# Altium PCB sion.PcbDoc
Units mm, origin at the board's own origin, x right, y up, seen from the top; angles counter-clockwise.
Board outline 144.6 x 80.67 mm, 2 copper layers (Top Layer, Bottom Layer); 228 components, 204 nets, 884 pads, 2 vias.
Unrouted connection lines stored in the file: 536.
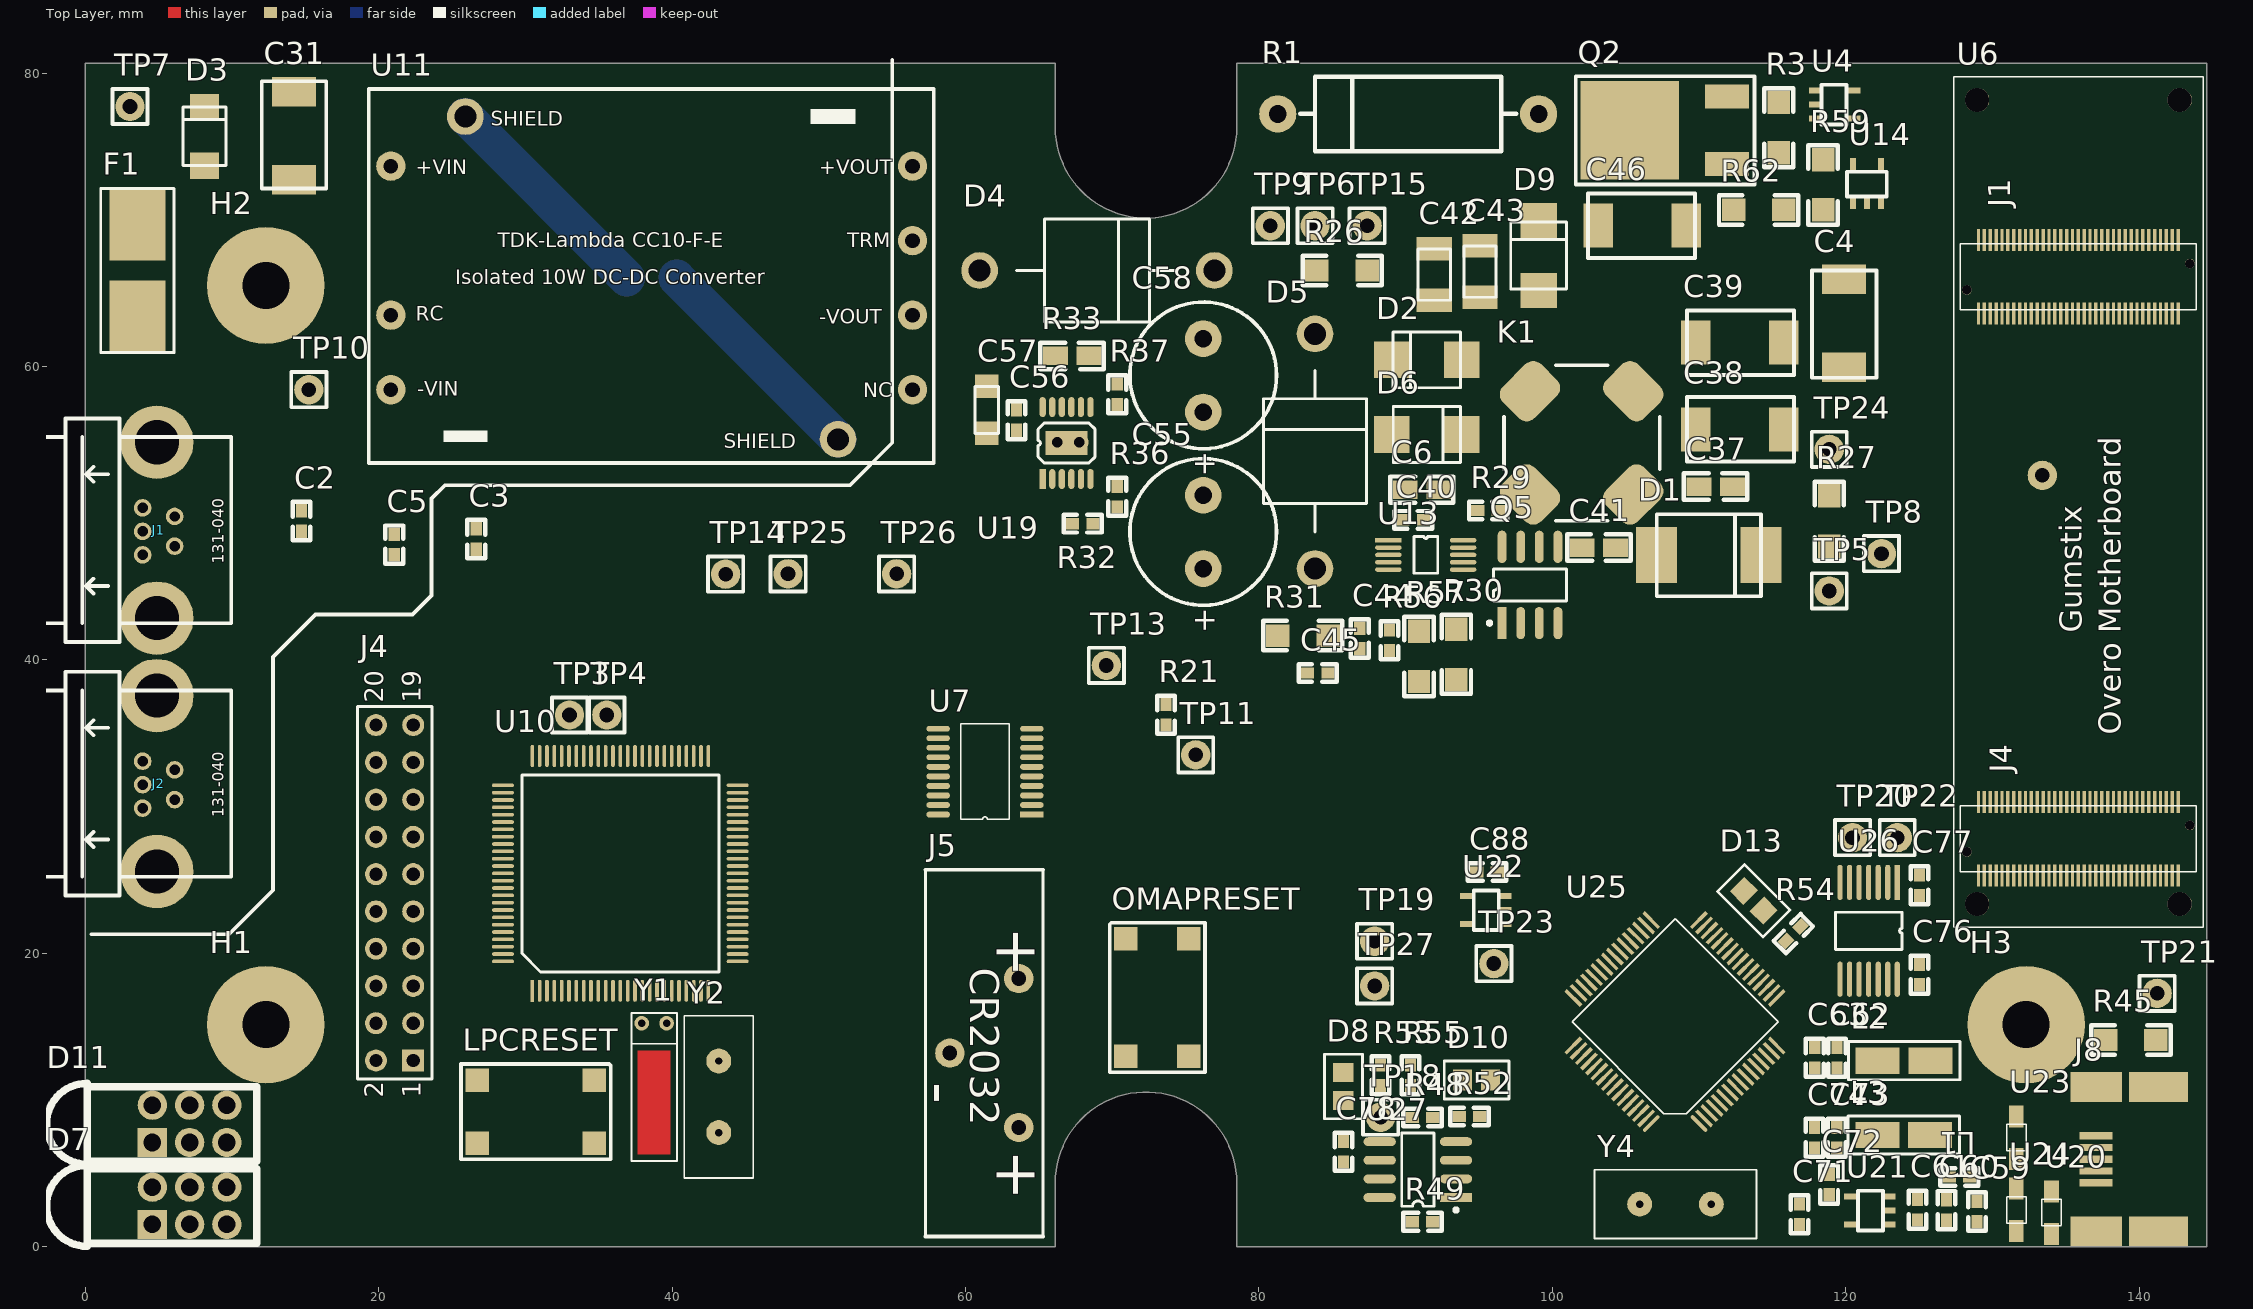
[diagram p0: Top Layer view]
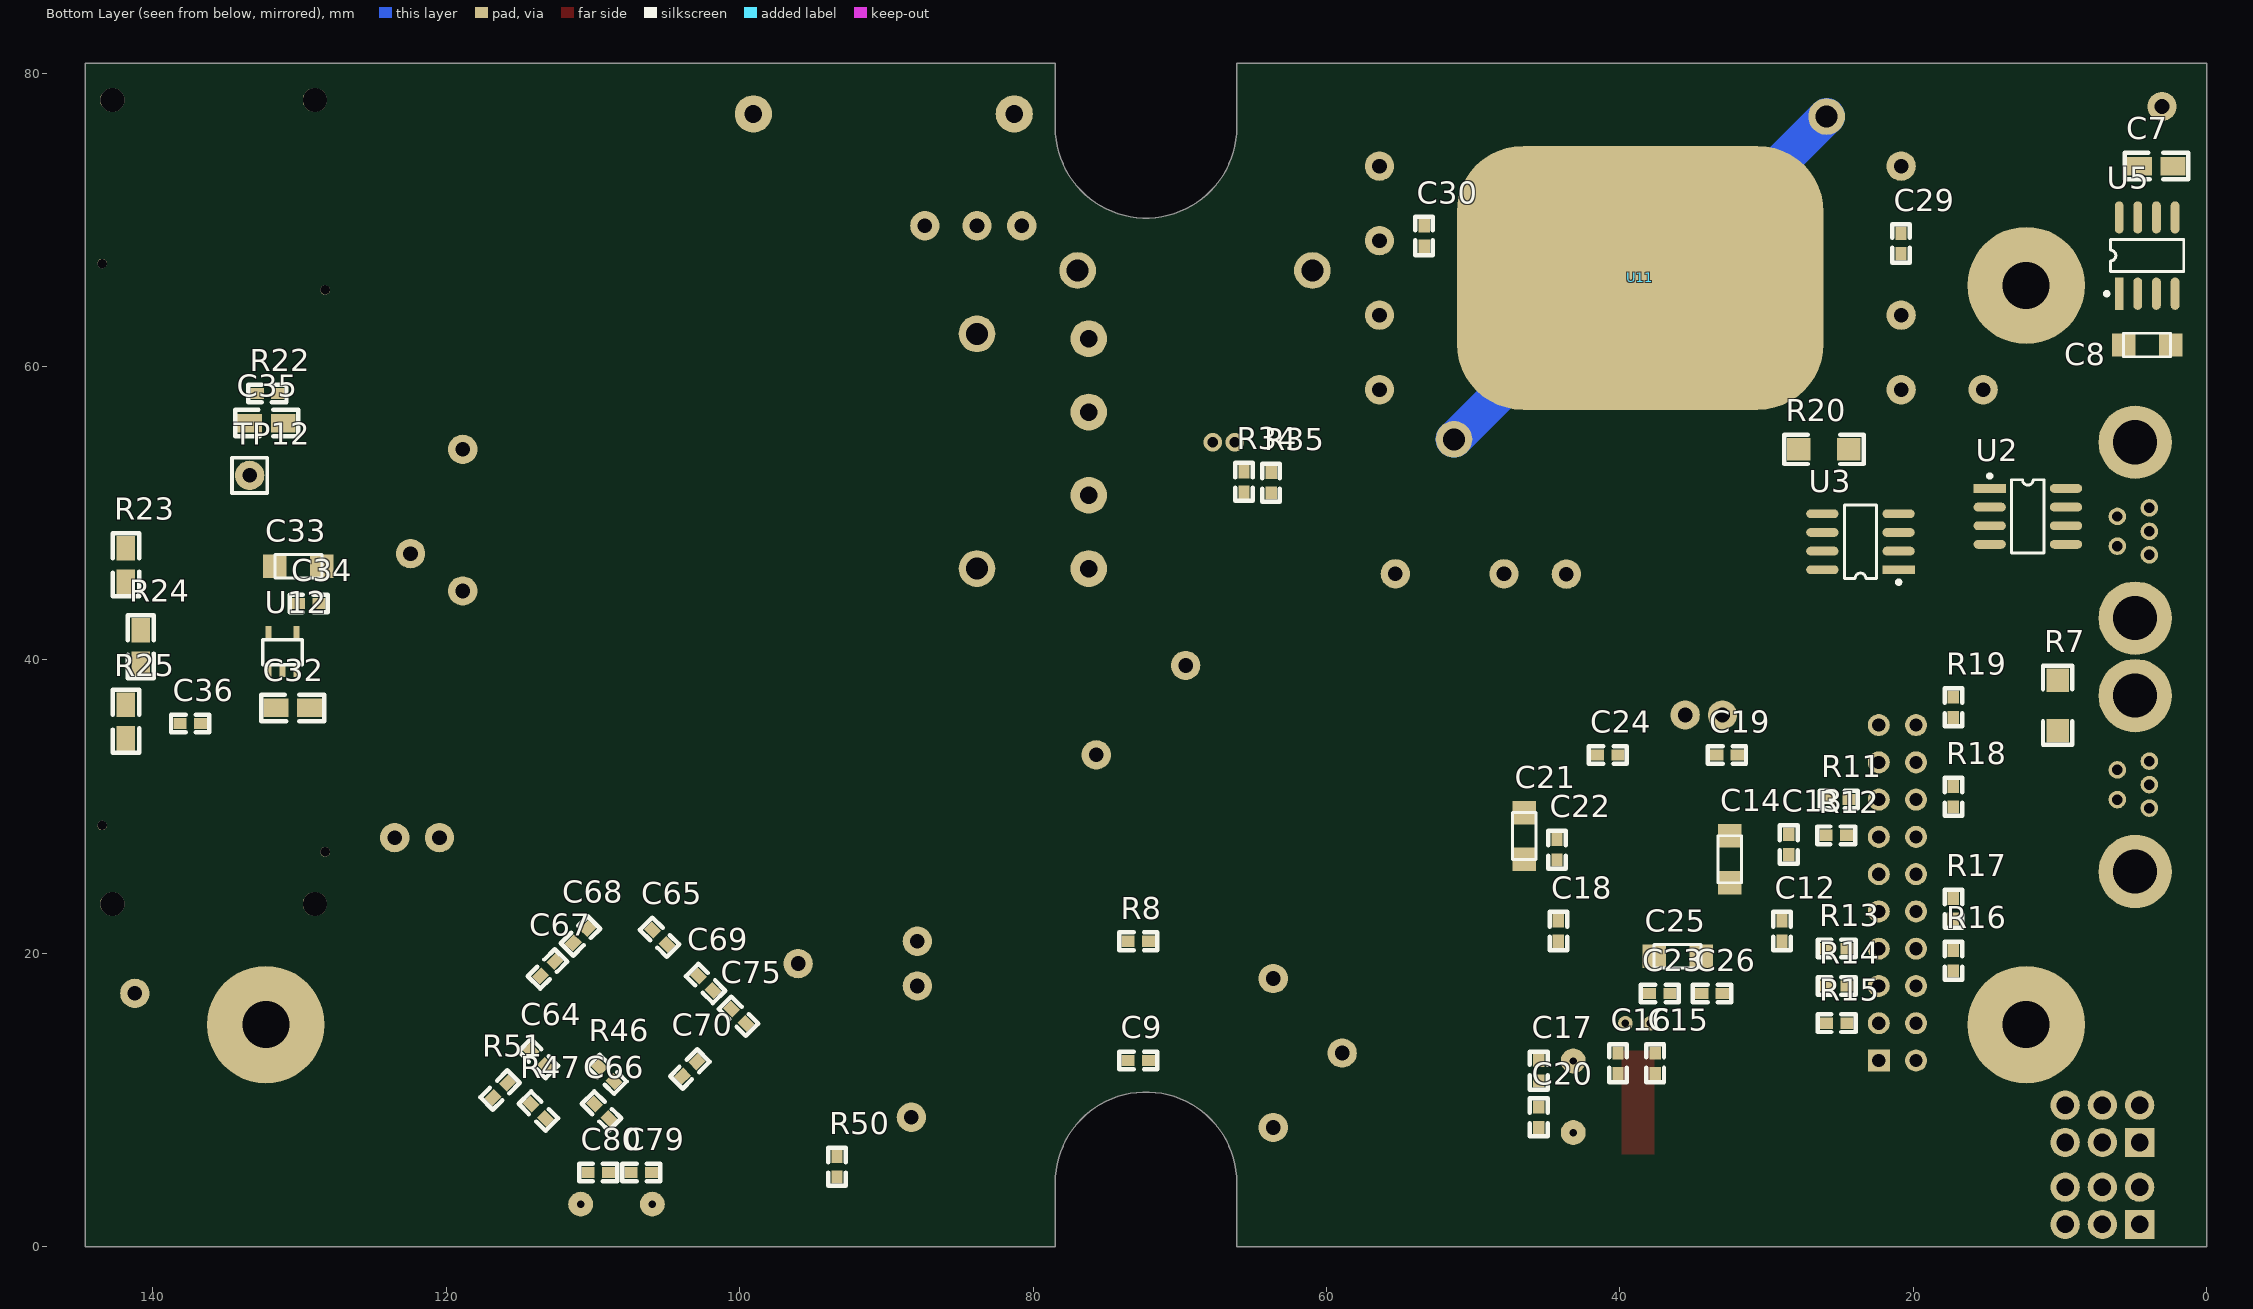
[diagram p1: Bottom Layer view, seen from below]

## Layer stack, top to bottom
Top Layer: signal copper 0.0356
Dielectric: dielectric 0.32, FR-4, Dk 4.8
Bottom Layer: signal copper 0.0356

## Board outline
0,0 0,80.67 66.11,80.67 66.11,76.31 ccw(c72.3,76.31) 78.49,76.31 78.49,80.67 144.6,80.67 144.6,0 78.49,0 78.49,4.36 ccw(c72.3,4.36) 66.11,4.36 66.11,0

## Design rules (kind name [scope] priority, off if disabled: settings)
Clearance [All] p1: gap=0.2
PolygonConnect [All] p1: connectstyle=Relief reliefconductorwidth=0.254 reliefentries=4 polygonreliefangle="90 Angle"
RoutingVias [All] p1: holewidth=0.711 width=1.27 viastyle="Through Hole" minholewidth=0.711 minwidth=1.27 maxholewidth=0.711 maxwidth=1.27
SilkscreenOverComponentPads [All] p1: minsilkscreentomaskgap=0.254
SolderMaskExpansion [All] p1: expansion=0.102
TestPointUsage [All] p1: valid=0 allowmultiple=FALSE
Testpoint [All] p1: side=15 testpointundercomponent=TRUE minsize=1.016 maxsize=2.54 preferedsize=1.524 minholesize=0 maxholesize=1.016 preferedholesize=0.813 testpointgrid=0.025 style=1023 order=0123456789
Width [All] p1: maxlimit=0.254 minlimit=0.254 preferedwidth=0.254
23 further rules are at their usual default settings.

## Classes and differential pairs
component class toplevel_os: D11 H1 H2 H3 H4 ID1 P1 Q6 Q7 R60 R61 R64 R69 R70 R71 R72 TP16 TP17 TP29 TP30
component class U_can_transciever_dualvolt_isolated: C2 C3 C5 C7 C8 D3 F1 J1 J2 R7 TP3 TP4 U2 U3 U5
component class U_can: C1 C47 C86 C87 D7 LPCRESET Q1 Q3 Q4 R2 R4 R5 R6 R28 R38 R39 R40 R41 R42 R43 R44 R68 TP1 TP2 TP28 U1 U7
component class U_Gumstix_Overo: C9 C10 C11 J3 OMAPRESET R8 R9 R10 U6 U7 U8 U9
component class U_LPC1768: C12 C13 C14 C15 C16 C17 C18 C19 C20 C21 C22 C23 C24 C25 C26 J4 R11 R12 R13 R14 R15 R16 R17 R18 R19 U10 Y1 Y2
component class U_powertrain: C29 C30 C31 C32 C33 C34 C35 C36 D4 D5 J5 R20 R21 R22 R23 R24 R25 TP7 TP8 TP9 TP10 TP11 TP12 TP13 TP14 U11 U12
component class U_sepic: C4 C6 C37 C38 C39 C40 C41 C42 C43 C44 C45 C46 D1 D2 D6 D9 K1 Q2 Q5 R1 R3 R26 R27 R29 R30 R31 R56 R57 R59 R62 TP5 TP6 TP15 TP24 TP25 TP26 U4 U13 U14
component class U_supercap: C55 C56 C57 C58 R32 R33 R34 R35 R36 R37 U19
component class U_usb_isolated_uart_x2: C59 C60 C61 C62 C63 C64 C65 C66 C67 C68 C69 C70 C71 C72 C73 C74 C75 C76 C77 C78 C79 C80 C88 D8 D10 D13 J8 L1 L2 L3 R45 R46 R47 R48 R49 R50 R51 R52 R53 R54 R55 TP18 TP19 TP20 TP21 TP22 TP23 TP27 U20 U21 U22 U23 U24 U25 U26 U27 Y4

## Components (designator, comment, footprint, x,y, rotation, side; value= is the part's Value field where it differs from the comment)
C1 "100nF" 0603 114.848,111.144 r0 top
C2 "100nF" 0603 14.732,48.768 r90 top
C3 "47nF" 0603 26.648,47.548 r90 top
C4 "150uF" MCCT-CASED 119.888,59.944 r90 top
C5 "47nF" 0603 21.06,48.564 r270 top
C6 "1uF" 0805 92.256,51.604 r180 top
C7 "1uF" 0805 4.572,73.66 r180 bottom
C8 "10uF" MCCT-CASEA 4.064,61.468 r180 bottom
C9 "100nF" 0603 72.136,12.7 r0 bottom
C12 "100nF" 0603 28.956,20.828 r90 bottom
C13 "100nF" 0603 28.488,26.72 r90 bottom
C14 "10uF" MCCT-CASEA 32.512,26.416 r90 bottom
C15 "18pF" 0603 37.592,13.208 r270 bottom
C16 "18pF" 0603 40.132,13.208 r270 bottom
C17 "18pF" 0603 45.53,12.7 r270 bottom
C18 "100nF" 0603 44.196,20.828 r90 bottom
C19 "100nF" 0603 32.004,33.528 r0 bottom
C20 "18pF" 0603 45.53,8.128 r90 bottom
C21 "10uF" MCCT-CASEA 46.52,28 r270 bottom
C22 "100nF" 0603 44.276,26.356 r90 bottom
C23 "100nF" 0603 36.576,17.272 r0 bottom
C24 "100nF" 0603 40.132,33.528 r0 bottom
C25 "10uF" MCCT-CASEA 36.068,19.812 r180 bottom
C26 "100nF" 0603 33.02,17.272 r0 bottom
C29 "100nF" 0603 20.828,69.088 r270 bottom
C30 "100nF" 0603 53.34,69.596 r270 bottom
C31 "100uF" MCCT-CASED 14.224,78.74 r270 top
C32 "1uF" 0805 131.6,36.732 r180 bottom
C33 "10uF" MCCT-CASEA 130.076,46.384 r180 bottom
C34 "10nF" 0603 130.076,43.844 r180 bottom
C35 "1uF" 0805 133.392,56.139 r180 bottom
C36 "100nF" 0603 136.756,35.676 r0 bottom
C37 "1uF" 0805 112.268,51.816 r180 top
C38 "150uF" MCCT-CASED 115.772,55.724 r180 top
C39 "150uF" MCCT-CASED 115.772,61.624 r180 top
C40 "100nF" 0603 89.824,49.552 r0 top
C41 "10uF" 0805 102.028,47.652 r0 top
C42 "22uF" MCCT-CASEB 91.948,64.516 r90 top
C43 "22uF" MCCT-CASEB 95.068,64.724 r90 top
C44 "33p" 0603 86.868,42.164 r270 top
C45 "1n2" 0603 83.312,39.116 r0 top
C46 "470uF" MCCT-CASED 103.124,69.596 r0 top
C47 "100nF" 0603 123.348,109.744 r90 top
C55 "3F3" ELECTROLYTIC-5-32 76.2,46.228 r90 top
C56 "100nF" 0603 63.48,57.048 r270 top
C57 "10uF" MCCT-CASEA 61.448,57.048 r270 top
C58 "3F3" ELECTROLYTIC-5-32 76.2,56.896 r90 top
C59 "10nF" 0603 128.952,1.704 r90 top
C60 "100nF" 0603 126.852,3.204 r270 top
C61 "4.7uF" 0603 124.888,3.228 r270 top
C62 "4.7uF" 0603 119.404,12.18 r90 top
C63 "100nF" 0603 117.88,12.18 r90 top
C64 "100nF" 0603 113.225,12.344 r45 bottom
C65 "100nF" 0603 104.963,20.606 r45 bottom
C66 "100nF" 0603 108.915,8.752 r45 bottom
C67 "100nF" 0603 113.584,18.451 r135 bottom
C68 "100nF" 0603 110.351,21.684 r315 bottom
C69 "100nF" 0603 102.808,18.451 r225 bottom
C70 "100nF" 0603 103.886,11.626 r135 bottom
C71 "100nF" 0603 116.836,1.512 r90 top
C72 "10nF" 0603 118.868,3.544 r90 top
C73 "4.7uF" 0603 119.38,8.128 r270 top
C74 "100nF" 0603 117.856,8.128 r270 top
C75 "4.7uF" 0603 99.575,15.218 r45 bottom
C76 "100nF" 0603 125.032,19.252 r270 top
C77 "100nF" 0603 125.032,25.348 r270 top
C78 "100nF" 0603 85.752,5.772 r90 top
C79 "18pF" 0603 106.014,5.059 r0 bottom
C80 "18pF" 0603 110.324,5.059 r180 bottom
C86 "100nF" 0603 53.348,109.744 r90 top
C87 "100nF" 0603 47.448,109.744 r90 top
C88 "100nF" 0603 96.24,25.548 r180 top
D1 "SSC53L" SMC 110.664,47.144 r0 top
D2 "MBRS130" SMB 91.44,60.452 r180 top
D3 "SMAJ12A-TR" SMA 8.128,75.692 r90 top
D4 "D SCHOTTKY" DIODE-D1.5mm 60.96,66.548 r0 top
D5 "D SCHOTTKY" DIODE-D1.5mm 83.82,46.228 r90 top
D6 "MBRS130" SMB 91.44,55.372 r0 top
D7 "1882-2781" LED_TRILEVEL 4.572,1.524 r90 top
D8 "LED" 0805LED 85.752,11.876 r270 top
D9 "MBRS130" SMB 99.06,67.564 r90 top
D10 "LED" 0805LED 93.88,11.368 r0 top
D11 "1882-2781" LED_TRILEVEL 4.572,7.112 r90 top
D13 "LED" 0805LED 114.399,22.915 r135 top
F1 "125mA/3A" LITTELFUSE-154 3.556,66.548 r90 top
H1 "HOLE" #6 12.305,15.145 r0 top locked
H2 "HOLE" #6 12.305,65.525 r0 top locked
H3 "HOLE" #6 132.295,15.145 r0 top locked
H4 "HOLE" #6 166.981,222.556 r0 top
ID1 "IDBOX" IDBOX 137.5,210.7 r90 top
J1 "CON5-S" TRIAD5F 6.096,49.784 r90 top
J2 "CON5-S" TRIAD5F 6.096,32.512 r90 top
J4 "ARM JTAG" HDR2X10 22.352,12.7 r90 top
J5 "CR2032" CR2032_VERTICAL 58.928,13.208 r270 top
J8 "USB_MINIB" USB_MINIB 137.068,5.964 r180 top
K1 "10uH" CTX2 98.472,58.32 r315 top
L1 "FERRITE" 0603 128.444,4.752 r180 top
L2 "2.2uH" 1210 123.976,12.688 r180 top
L3 "2.2uH" 1210 123.952,7.62 r180 top
LPCRESET "B3FS" B3FS-1052 25.908,12.192 r0 top
OMAPRESET "B3FS" B3FS-1052 70.104,12.192 r90 top
P1 "SUN_LOGO" SUNSWIFTLOGO 94.488,202.692 r0 top
Q1 "ZXM61N02F" SOT23-3 79.348,109.144 r0 top
Q2 "S6006DS2CT-ND" DPAK_N-MOSFET 105.268,76.096 r90 top
Q3 "ZXM61N02F" SOT23-3 182.348,109.144 r0 top
Q4 "ZXM61N02F" SOT23-3 145.348,109.144 r0 top
Q5 "Si7882DP" SO8 98.472,45.112 r0 top
Q6 "ZXM61N02F" SOT23-3 231.6,227.9 r0 top
Q7 "ZXM61N02F" SOT23-3 204.2,227.9 r0 top
R1 "10R" DIODE0.7 99.06,77.216 r180 top
R2 "10K" 0603 149.948,111.144 r0 top
R3 "100K" 1206 115.428,74.572 r90 top
R4 "10K" 0603 119.048,111.144 r0 top
R5 "10K" 0603 75.148,111.144 r0 top
R6 "100R" 0603 70.848,111.144 r0 top
R7 "0R" 1206 10.16,38.608 r270 bottom
R8 "10K" 0603 72.136,20.828 r0 bottom
R11 "10k" 0603 24.384,30.48 r0 bottom
R12 "10k" 0603 25.952,28.048 r180 bottom
R13 "10k" 0603 25.908,20.32 r180 bottom
R14 "10k" 0603 25.908,17.78 r180 bottom
R15 "10k" 0603 25.908,15.24 r180 bottom
R16 "10k" 0603 17.272,18.796 r90 bottom
R17 "10k" 0603 17.272,22.352 r90 bottom
R18 "10k" 0603 17.272,29.972 r90 bottom
R19 "10k" 0603 17.272,36.068 r90 bottom
R20 "0R" 1206 24.384,54.356 r0 bottom
R21 "4k7" 0603 73.66,35.56 r90 top
R22 "3k3" 0603 132.884,58.171 r180 bottom
R23 "22k" 0805 141.836,45.328 r90 bottom
R24 "22k" 0805 140.82,39.74 r90 bottom
R25 "10k" 0805 141.836,34.66 r90 bottom
R26 "0R01" 1206 87.376,66.548 r180 top
R27 "0R01" 1206 118.872,47.752 r90 top
R28 "10K" 0603 64.948,109.744 r90 top
R29 "80R" 0603 94.916,50.192 r0 top
R30 "17K4" 1206 93.452,42.088 r270 top
R31 "26K" 1206 81.28,41.656 r0 top
R32 "309K" 0603 67.292,49.288 r0 top
R33 "173K" 0805 68.408,60.728 r180 top
R34 "1K" 0603 65.62,51.436 r90 bottom
R35 "1K" 0603 63.768,51.376 r90 bottom
R36 "100K" 0603 70.34,51.828 r270 top
R37 "100K" 0603 70.34,57.416 r90 top
R38 "220R" 0603 186.948,109.744 r90 top
R39 "100R" 0603 176.548,109.744 r90 top
R40 "220R" 0603 170.748,109.744 r90 top
R41 "10K" 0603 165.448,109.744 r90 top
R42 "220R" 0603 159.548,109.744 r90 top
R43 "100R" 0603 135.048,109.744 r90 top
R44 "10K" 0603 129.248,109.744 r90 top
R45 "0R" 1206 141.132,14.092 r180 top
R46 "12k" 0603 108.555,11.267 r45 bottom
R47 "4k7" 0603 113.225,8.752 r45 bottom
R48 "10k" 0603 91.848,8.82 r180 top
R49 "10k" 0603 91.848,1.708 r180 top
R50 "10k" 0603 93.372,4.764 r90 bottom
R51 "10k" 0603 116.817,10.189 r135 bottom
R52 "2k2" 0603 93.652,8.884 r0 top
R53 "1k" 0603 88.292,12.384 r270 top
R54 "1k" 0603 116.913,21.837 r225 top
R55 "1k" 0603 90.324,12.384 r270 top
R56 "65K" 0603 88.9,40.64 r90 top
R57 "10K" 1206 90.912,38.532 r90 top
R59 "11K3" 1206 118.452,70.676 r90 top
R60 "220R" 0603 243.3,228.5 r90 top
R61 "100R" 0603 226.3,228.5 r90 top
R62 "10K" 1206 112.356,70.676 r0 top
R64 "220R" 0603 220.5,228.5 r90 top
R68 "1k" 0603 59.148,109.744 r90 top
R69 "10K" 0603 214.7,228.5 r90 top
R70 "100R" 0603 208.8,228.5 r90 top
R71 "100R" 0603 199,228.5 r90 top
R72 "10K" 0603 193.1,228.5 r90 top
TP1 "RESET" TESTPOINT 154.848,110.544 r0 top
TP2 "RSTOUT" TESTPOINT 97.948,110.544 r0 top
TP3 "RX" TESTPOINT 33.008,36.248 r270 top
TP4 "TX" TESTPOINT 35.548,36.248 r270 top
TP5 "VOUT" TESTPOINT 118.872,44.704 r270 top
TP6 "VIN" TESTPOINT 83.82,69.596 r0 top
TP7 "CAN12V" TESTPOINT 3.048,77.724 r0 top
TP8 "3V3" TESTPOINT 122.428,47.244 r0 top
TP9 "5V" TESTPOINT 80.772,69.596 r0 top
TP10 "CANGND" TESTPOINT 15.24,58.42 r90 top
TP11 "VSENSE" TESTPOINT 75.692,33.528 r90 top
TP12 "ISENSE" TESTPOINT 133.392,52.583 r90 bottom
TP13 "VCAP" TESTPOINT 69.596,39.624 r90 top
TP14 "GND" TESTPOINT 43.648,45.852 r90 top
TP15 "5V" TESTPOINT 87.376,69.596 r90 top
TP16 "SYS_EN" TESTPOINT 257,229.3 r90 top
TP17 "WKUP" TESTPOINT 236.8,229.3 r90 top
TP18 "3V3USB" TESTPOINT 88.292,8.828 r0 top
TP19 "TXD3V3" TESTPOINT 87.884,20.828 r90 top
TP20 "RXD1V8" TESTPOINT 120.46,27.888 r180 top
TP21 "SHD" TESTPOINT 141.224,17.272 r90 top
TP22 "TXD1V8" TESTPOINT 123.508,27.888 r90 top
TP23 "FTDI_RST" TESTPOINT 96.012,19.304 r180 top
TP24 "3V3" TESTPOINT 118.872,54.356 r0 top
TP25 "GND" TESTPOINT 47.9,45.872 r90 top
TP26 "GND" TESTPOINT 55.3,45.872 r90 top
TP27 "RXD3V3" TESTPOINT 87.884,17.78 r90 top
TP28 "CLKOUT" TESTPOINT 90.548,110.544 r90 top
TP29 "SPI1_NIRQ_LPC" TESTPOINT 264.1,229.3 r90 top
TP30 "SPI_NIRQ_OMAP" TESTPOINT 271.5,229.3 r90 top
U1 "MCP120T-300I/TT" SOT23-3 140.848,109.144 r0 top
U2 "SN65HVD232" SO8 12.192,49.784 r270 bottom
U3 "IL712-3E" SO8 23.6,48.056 r90 bottom
U4 "MAX9100" SOT23-5 117.944,78.804 r270 top
U5 "MIC5200" SO8 4.064,67.564 r180 bottom
U6 "Overo" Overo-bare 142.748,23.368 r90 top
U7 "TXB0108PWR" TSSOP20 64.516,29.464 r180 top
U10 "LPC1768" QFP100 30.468,17.452 r90 top
U11 "TDK-LAMBDA CC-E" CC10-F-E 20.828,58.42 r0 top
U12 "MIC5247" SOT23-5 132.108,39.272 r180 bottom
U13 "ADP1621" MSOP10 88.82,48.16 r0 top
U14 "MAX6037CAUKADJ" SOT23-5 120.484,71.184 r0 top
U19 "LTC4425" MS-12 65.26,52.336 r90 top
U20 "PESD5V0X" SOD323 134.02,0.884 r0 top
U21 "REG113-33" SOT23-5 122.932,1.512 r90 top
U22 "SN74AHC1G126" SOT23-5 96.748,21.992 r90 top
U23 "PESD5V0X" SOD323 131.628,5.996 r0 top
U24 "PESD5V0X" SOD323 131.628,3.964 r180 top
U25 "FT2232H" QFP64 109.992,8.393 r135 top
U26 "TXB104PWR" TSSOP14-L 123.508,24.84 r270 top
U27 "93LC46BT-I/SN" SO8 90.832,5.264 r90 top
Y1 "32.768 KHz" WATCHA 39.624,15.24 r180 top
Y2 "12 MHz" HC49/4H 43.18,15.748 r270 top
Y4 "12 MHz" HC49/4H 113.917,2.904 r180 top

## Footprints (in the part's own frame and the unit in brackets; to place one, negate y for a bottom-side part, rotate by r counter-clockwise, add the part's x,y. Pads: shape width x height; smd on the part's side, far side on the other; paste and mask are expansions set on the pad)
0603 [mil]
  rect 35.43x30 smd: 1(0,0) 2(55,0)
  silkscreen extent -24,-24 79,24
0805 [mm]
  rect 1.7x1.27 smd: 1(0,0) 2(2.286,0)
  silkscreen extent -1,-0.9 3.3,0.9
0805LED [mm]
  rect 1.3x1.4 smd: A(0,0) K(1.9,0)
  silkscreen extent -1.25,-1.3 3.15,1.3
1206 [mil]
  rect 62.99x60 smd: 1(0,0) 2(135,0)
  silkscreen extent -39,-39 173,39
1210 [mm]
  rect 3x1.8 smd: 1(-1.8,0) 2(1.8,0)
  silkscreen extent -3.8,-1.3 3.8,1.3
#6 [mm]
  round 8 hole 3.2: 1(0,0)
B3FS-1052 [mm] "SMD SPNO tactile switch"
  rect 1.6x1.6 smd: 1(0.8,-0.825) 2(8.8,-0.825) 3(0.8,-5.125) 4(8.8,-5.125)
  silkscreen extent -0.3,-6.22 9.9,0.28
CC10-F-E [mm]
  round 2 hole 1: 1(0,15.24) 2(0,5.08) 3(0,0) 4(35.56,0) 5(35.56,5.08) 6(35.56,10.16) 7(35.56,15.24)
  round 2.5 hole 1.5: 8(5.08,18.62) 8(30.48,-3.38)
  rrect50% 25x18 smd far side: 8(17.78,7.62)
  Bottom Layer lines w2.5: 5.08,18.62 16.08,7.62 ; 19.48,7.62 30.48,-3.38
  silkscreen extent -1.5,-5 37,20.5
CR2032_VERTICAL [mm] "VBH2032-1-LF Coin cell vertical holder"
  round 2 hole 1: 1(-5.075,4.7) 1(5.075,4.7) 2(0,0)
  silkscreen extent -12.5,-1.65 12.5,6.35
CTX2 [mm] "Coupled Inductors"
  rrect50% 3.05x3.68 smd: 1(0,0) 3(9.96,0)
  rrect50% 3.68x3.05 smd: 2(4.98,-4.98) 4(4.98,4.98)
  silkscreen extent 0,-5 10,5
DIODE0.7 [mm]
  round 2.54 hole 1.2: 1(0,0) 2(17.78,0)
  silkscreen extent 1.52,-2.54 16.26,2.54
DIODE-D1.5mm [mm]
  round 2.5 hole 1.5: A(0,0) K(16,0)
  silkscreen extent 2.5,-3.5 13.5,3.5
DPAK_N-MOSFET [mm] "STD12NF06L"
  rect 1.65x3 smd: 1(-2.3,-6.65) 3(2.3,-6.65)
  rect 6.7x6.7 smd: 2(0,0)
  silkscreen extent -3.68,-8.51 3.68,3.68
ELECTROLYTIC-5-32 [mm] "Supercapacitor"
  round 2.5 hole 1.2: 1(0,0) 2(5,0)
  silkscreen extent -2.5,-5 7.5,5
HC49/4H [mm]
  round 1.7 hole 0.5: 1(3.085,0) 2(7.965,0)
  silkscreen extent 0,-2.35 11.05,2.35
HDR2X10 [mm] "Connector; Header; 10x2 Position"
  rect 1.5x1.5 hole 0.9: 1(0,0)
  round 1.5 hole 0.9: 2(0,2.54) 3(2.54,0) 4(2.54,2.54) 5(5.08,0) 6(5.08,2.54) 7(7.62,0) 8(7.62,2.54) 9(10.16,0) 10(10.16,2.54) 11(12.7,0) 12(12.7,2.54) 13(15.24,0) 14(15.24,2.54) 15(17.78,0) 16(17.78,2.54) 17(20.32,0) 18(20.32,2.54) 19(22.86,0) 20(22.86,2.54)
  silkscreen extent -1.27,-1.27 24.13,3.81
IDBOX [mm] "Infobox"
  silkscreen extent 0,-7 19.95,0
LED_TRILEVEL [mm]
  rect 2x2 hole 1.2: 1(0,0)
  round 2 hole 1.2: 2(0,-2.54) 3(0,-5.08) 4(2.54,-5.08) 5(2.54,-2.54) 6(2.54,0)
  silkscreen extent -1.49,-7.11 4.03,7.21
LITTELFUSE-154 [mm]
  rect 5x3.81 smd: 1(-3.185,0) 2(3.185,0)
  silkscreen extent -5.6,-2.51 5.6,2.5
MCCT-CASEA [mm]
  rect 1.6x1.6 smd: 1(-1.6,0) 2(1.6,0)
  silkscreen extent -1.6,-0.8 1.6,0.8
MCCT-CASEB [mm]
  rect 1.6x2.4 smd: 1(0,0) 2(3.5,0)
  silkscreen extent 0,-1.1 3.5,1.1
MCCT-CASED [mm]
  rect 2x3 smd: 1(0,0) 2(6,0)
  silkscreen extent -0.7,-2.2 6.6,2.2
MS-12 [mm] "LTC4425"
  rect 1.364x0.42 smd: 1(0,0)
  oval 1.364x0.42 smd: 2(0,-0.65) 3(0,-1.3) 4(0,-1.95) 5(0,-2.6) 6(0,-3.25) 7(4.9,-3.25) 8(4.9,-2.6) 9(4.9,-1.95) 10(4.9,-1.3) 11(4.9,-0.65) 12(4.9,0)
  rect 1.651x2.845 smd: 13(2.45,-1.625)
  silkscreen extent 1.1,-3.58 3.8,0.33
MSOP10 [mm] "ADM1191"
  rect 1.8x0.3 smd: 1(0,0)
  oval 1.8x0.3 smd: 2(0,-0.5) 3(0,-1) 4(0,-1.5) 5(0,-2) 6(5.1,-2) 7(5.1,-1.5) 8(5.1,-1) 9(5.1,-0.5) 10(5.1,0)
  silkscreen extent 1.73,-2.25 3.37,0.25
Overo-bare [mm] "Gumstix Overo Motherboard placement"
  round 1.65 hole 1.65 unplated: 0(0,13.8) 0(0,0) 0(54.8,0) 0(54.8,13.8)
  round 0.65 hole 0.65: 0(3.55,14.5) 0(5.35,-0.7) 0(41.85,14.5) 0(43.65,-0.7)
  rect 1.5x0.23 smd: J1_1(40.25,0.1) J1_2(40.25,0.5) J1_3(40.25,0.9) J1_4(40.25,1.3) J1_5(40.25,1.7) J1_6(40.25,2.1) J1_7(40.25,2.5) J1_8(40.25,2.9) J1_9(40.25,3.3) J1_10(40.25,3.7) J1_11(40.25,4.1) J1_12(40.25,4.5) J1_13(40.25,4.9) J1_14(40.25,5.3) J1_15(40.25,5.7) J1_16(40.25,6.1) J1_17(40.25,6.5) J1_18(40.25,6.9) J1_19(40.25,7.3) J1_20(40.25,7.7) J1_21(40.25,8.1) J1_22(40.25,8.5) J1_23(40.25,8.9) J1_24(40.25,9.3) J1_25(40.25,9.7) J1_26(40.25,10.1) J1_27(40.25,10.5) J1_28(40.25,10.9) J1_29(40.25,11.3) J1_30(40.25,11.7) J1_31(40.25,12.1) J1_32(40.25,12.5) J1_33(40.25,12.9) J1_34(40.25,13.3) J1_35(40.25,13.7) J1_36(45.25,13.7) J1_37(45.25,13.3) J1_38(45.25,12.9) J1_39(45.25,12.5) J1_40(45.25,12.1) J1_41(45.25,11.7) J1_42(45.25,11.3) J1_43(45.25,10.9) J1_44(45.25,10.5) J1_45(45.25,10.1) J1_46(45.25,9.7) J1_47(45.25,9.3) J1_48(45.25,8.9) J1_49(45.25,8.5) J1_50(45.25,8.1) J1_51(45.25,7.7) J1_52(45.25,7.3) J1_53(45.25,6.9) J1_54(45.25,6.5) J1_55(45.25,6.1) J1_56(45.25,5.7) J1_57(45.25,5.3) J1_58(45.25,4.9) J1_59(45.25,4.5) J1_60(45.25,4.1) J1_61(45.25,3.7) J1_62(45.25,3.3) J1_63(45.25,2.9) J1_64(45.25,2.5) J1_65(45.25,2.1) J1_66(45.25,1.7) J1_67(45.25,1.3) J1_68(45.25,0.9) J1_69(45.25,0.5) J1_70(45.25,0.1) J4_1(6.95,13.7) J4_2(6.95,13.3) J4_3(6.95,12.9) J4_4(6.95,12.5) J4_5(6.95,12.1) J4_6(6.95,11.7) J4_7(6.95,11.3) J4_8(6.95,10.9) J4_9(6.95,10.5) J4_10(6.95,10.1) J4_11(6.95,9.7) J4_12(6.95,9.3) J4_13(6.95,8.9) J4_14(6.95,8.5) J4_15(6.95,8.1) J4_16(6.95,7.7) J4_17(6.95,7.3) J4_18(6.95,6.9) J4_19(6.95,6.5) J4_20(6.95,6.1) J4_21(6.95,5.7) J4_22(6.95,5.3) J4_23(6.95,4.9) J4_24(6.95,4.5) J4_25(6.95,4.1) J4_26(6.95,3.7) J4_27(6.95,3.3) J4_28(6.95,2.9) J4_29(6.95,2.5) J4_30(6.95,2.1) J4_31(6.95,1.7) J4_32(6.95,1.3) J4_33(6.95,0.9) J4_34(6.95,0.5) J4_35(6.95,0.1) J4_36(1.95,0.1) J4_37(1.95,0.5) J4_38(1.95,0.9) J4_39(1.95,1.3) J4_40(1.95,1.7) J4_41(1.95,2.1) J4_42(1.95,2.5) J4_43(1.95,2.9) J4_44(1.95,3.3) J4_45(1.95,3.7) J4_46(1.95,4.1) J4_47(1.95,4.5) J4_48(1.95,4.9) J4_49(1.95,5.3) J4_50(1.95,5.7) J4_51(1.95,6.1) J4_52(1.95,6.5) J4_53(1.95,6.9) J4_54(1.95,7.3) J4_55(1.95,7.7) J4_56(1.95,8.1) J4_57(1.95,8.5) J4_58(1.95,8.9) J4_59(1.95,9.3) J4_60(1.95,9.7) J4_61(1.95,10.1) J4_62(1.95,10.5) J4_63(1.95,10.9) J4_64(1.95,11.3) J4_65(1.95,11.7) J4_66(1.95,12.1) J4_67(1.95,12.5) J4_68(1.95,12.9) J4_69(1.95,13.3) J4_70(1.95,13.7)
  silkscreen extent -1.6,-1.6 56.4,15.4
QFP64 [mm]
  oval 1.5x0.25 smd: 1(0.008,-0.005)
  rect 1.5x0.25 smd: 2(0.008,-0.505) 3(0.008,-1.005) 4(0.008,-1.505) 5(0.008,-2.005) 6(0.008,-2.505) 7(0.008,-3.005) 8(0.008,-3.505) 9(0.008,-4.005) 10(0.008,-4.505) 11(0.008,-5.005) 12(0.008,-5.505) 13(0.008,-6.005) 14(0.008,-6.505) 15(0.008,-7.005) 16(0.008,-7.505) 33(12.108,-7.505) 34(12.108,-7.005) 35(12.108,-6.505) 36(12.108,-6.005) 37(12.108,-5.505) 38(12.108,-5.005) 39(12.108,-4.505) 40(12.108,-4.005) 41(12.108,-3.505) 42(12.108,-3.005) 43(12.108,-2.505) 44(12.108,-2.005) 45(12.108,-1.505) 46(12.108,-1.005) 47(12.108,-0.505) 48(12.108,-0.005)
  rect 0.25x1.5 smd: 17(2.308,-9.805) 18(2.808,-9.805) 19(3.308,-9.805) 20(3.808,-9.805) 21(4.308,-9.805) 22(4.808,-9.805) 23(5.308,-9.805) 24(5.808,-9.805) 25(6.308,-9.805) 26(6.808,-9.805) 27(7.308,-9.805) 28(7.808,-9.805) 29(8.308,-9.805) 30(8.808,-9.805) 31(9.308,-9.805) 32(9.808,-9.805) 49(9.808,2.295) 50(9.308,2.295) 51(8.808,2.295) 52(8.308,2.295) 53(7.808,2.295) 54(7.308,2.295) 55(6.808,2.295) 56(6.308,2.295) 57(5.808,2.295) 58(5.308,2.295) 59(4.808,2.295) 60(4.308,2.295) 61(3.808,2.295) 62(3.308,2.295) 63(2.808,2.295)
  oval 0.25x1.5 smd: 64(2.308,2.295)
  silkscreen extent 1.09,-8.72 11.02,1.21
QFP100 [mm]
  rect 1.5x0.25 smd: 1(0,0)
  oval 1.5x0.25 smd: 2(0,-0.5) 3(0,-1) 4(0,-1.5) 5(0,-2) 6(0,-2.5) 7(0,-3) 8(0,-3.5) 9(0,-4) 10(0,-4.5) 11(0,-5) 12(0,-5.5) 13(0,-6) 14(0,-6.5) 15(0,-7) 16(0,-7.5) 17(0,-8) 18(0,-8.5) 19(0,-9) 20(0,-9.5) 21(0,-10) 22(0,-10.5) 23(0,-11) 24(0,-11.5) 25(0,-12) 51(16,-12) 52(16,-11.5) 53(16,-11) 54(16,-10.5) 55(16,-10) 56(16,-9.5) 57(16,-9) 58(16,-8.5) 59(16,-8) 60(16,-7.5) 61(16,-7) 62(16,-6.5) 63(16,-6) 64(16,-5.5) 65(16,-5) 66(16,-4.5) 67(16,-4) 68(16,-3.5) 69(16,-3) 70(16,-2.5) 71(16,-2) 72(16,-1.5) 73(16,-1) 74(16,-0.5) 75(16,0)
  oval 0.25x1.5 smd: 26(2,-14) 27(2.5,-14) 28(3,-14) 29(3.5,-14) 30(4,-14) 31(4.5,-14) 32(5,-14) 33(5.5,-14) 34(6,-14) 35(6.5,-14) 36(7,-14) 37(7.5,-14) 38(8,-14) 39(8.5,-14) 40(9,-14) 41(9.5,-14) 42(10,-14) 43(10.5,-14) 44(11,-14) 45(11.5,-14) 46(12,-14) 47(12.5,-14) 48(13,-14) 49(13.5,-14) 50(14,-14) 76(14,2) 77(13.5,2) 78(13,2) 79(12.5,2) 80(12,2) 81(11.5,2) 82(11,2) 83(10.5,2) 84(10,2) 85(9.5,2) 86(9,2) 87(8.5,2) 88(8,2) 89(7.5,2) 90(7,2) 91(6.5,2) 92(6,2) 93(5.5,2) 94(5,2) 95(4.5,2) 96(4,2) 97(3.5,2) 98(3,2) 99(2.5,2) 100(2,2)
  silkscreen extent 1.28,-12.71 14.71,0.72
SMA [mm]
  rect 1.8x2 smd: A(-2,0) K(2,0)
  silkscreen extent -2,-1.48 2,1.48
SMB [mm]
  rect 2.4x2.5 smd: A(-2.385,0) K(2.385,0)
  silkscreen extent -2.28,-1.9 2.3,1.9
SMC [mil]
  rect 110x150 smd: A(-140.5,0) K(140.5,0)
  silkscreen extent -140,-110 140,110
SO8 [mm]
  rect 0.6x2.2 smd: 1(-1.905,-2.6)
  oval 0.6x2.2 smd: 2(-0.635,-2.6) 3(0.635,-2.6) 4(1.905,-2.6) 5(1.905,2.6) 6(0.635,2.6) 7(-0.635,2.6) 8(-1.905,2.6)
  silkscreen extent -2.88,-2.72 2.5,1.1
SOD323 [mm]
  rect 1x1.5 smd: 0(0,0) 1(0,2.9)
  silkscreen extent -0.67,0.55 0.67,2.35
SOT23-3 [mm]
  rect 1x1.25 smd: 1(0,0) 2(1.905,0) 3(0.965,2.032)
  silkscreen extent -0.51,-0.13 2.41,2.16
SOT23-5 [mm]
  rect 0.4x0.9 smd: 1(0,0) 2(0.953,0) 3(1.91,0) 4(1.91,2.59) 5(0,2.59)
  silkscreen extent -0.4,0.4 2.3,2.1
SUNSWIFTLOGO [mm] "Sunswift Logo"
  silkscreen extent -9.32,-3.58 10.19,3.81
TESTPOINT [mm] "Test point pad"
  round 2 hole 1: 0(0,0)
  silkscreen extent -1.2,-1.2 1.2,1.2
TRIAD5F [mm]
  round 5 hole 3: 0(-6.934,1.219) 0(5.055,1.219)
  round 1.2 hole 0.7: 1(0,0) 2(0.584,2.184) 3(-1.016,2.184) 4(-2.616,2.184) 5(-2.032,0)
  silkscreen extent -8.56,-3.86 6.68,10.87
TSSOP14-L [mm] "TSSOP14 extra long pads"
  rect 2.4x0.35 smd: 1(0,0)
  oval 2.4x0.35 smd: 2(0,-0.65) 3(0,-1.3) 4(0,-1.95) 5(0,-2.6) 6(0,-3.25) 7(0,-3.9) 8(6.6,-3.9) 9(6.6,-3.25) 10(6.6,-2.6) 11(6.6,-1.95) 12(6.6,-1.3) 13(6.6,-0.65) 14(6.6,0)
  silkscreen extent 2.03,-4.23 4.56,0.33
TSSOP20 [mm]
  rect 1.6x0.4 smd: 1(0,0)
  oval 1.6x0.4 smd: 2(0,-0.65) 3(0,-1.3) 4(0,-1.95) 5(0,-2.6) 6(0,-3.25) 7(0,-3.9) 8(0,-4.55) 9(0,-5.2) 10(0,-5.85) 11(6.38,-5.85) 12(6.38,-5.2) 13(6.38,-4.55) 14(6.38,-3.9) 15(6.38,-3.25) 16(6.38,-2.6) 17(6.38,-1.95) 18(6.38,-1.3) 19(6.38,-0.65) 20(6.38,0)
  silkscreen extent 1.53,-6.18 4.85,0.33
USB_MINIB [mm] "USB Mini B connector SMT"
  rect 2.25x0.5 smd mask+0: 1(0,1.6) 2(0,0.8) 3(0,0) 4(0,-0.8) 5(0,-1.6)
  rect 1.2x6.4 on Top Overlay mask+0: 2(-7.052,0)
  rect 4x2.05 smd mask+0: 6(-4.25,4.925) 6(-4.25,-4.925)
  rect 3.5x2.05 smd mask+0: 6(0,4.925) 6(0,-4.925)
WATCHA [mm]
  round 1 hole 0.5: 1(0,0) 2(1.7,0)
  Top Layer region: -0.25,1.85 2,1.85 2,8.95 -0.25,8.95
  silkscreen extent -0.7,-0.7 2.4,9.4

## Part data
C1 C2 C3 C5 C6 C7 C9 C12 C13 C15 C16 C17 C18 C19 C20 C22 C23 C24 C26 C29 C30 C32 C34 C35 C36 C37 C40 C44 C45 C47 C56 C59 C60 C61 C62 C63 C64 C65 C66 C67 C68 C69 C70 C71 C72 C73 C74 C75 C76 C77 C78 C79 C80 C86 C87 C88: library part CAP, "Capacitor"
C4 C8 C14 C21 C25 C31 C33 C38 C39 C42 C43 C46 C57: library part "CAP POL3", "Polarized Capacitor (Surface Mount)"
C41: library part CAP, "grm21br61a106k"
C55 C58: library part CAP-POL, "Supercap"
D1 D2 D6 D9: library part "D SCHOTTKY", "Schottky Diode"
D3: library part DIODE, "12V TVS Diode"
D4 D5: "Schottky Diode"
D7 D11: library part LED-TRILEVEL, "Three level LED"
F1: library part FUSE2, "Fuse"
H1 H2 H3 H4: "Hole"
J1 J2: "Connector, 2 pin, with shield @ S"
J4: library part "Header 10X2", "Header, 10-Pin, Dual row"
J5: "Battery Coin CR2032 3V"
J8: library part USB_miniB_SMT, "USB Mini B Connector"
K1: library part CTX10-2-R, "Coupled Power Inductor"
L1 L2 L3: library part INDUCTOR, "Inductor"
LPCRESET OMAPRESET: "SMD tactile switch"
Q1 Q3 Q4 Q6 Q7: "1.7A, 20V N-Channel Enhancement mode FET"
Q2: library part SCR, "Sensitive SCR"
Q5: "Power N mosfet"
R1 R2 R3 R4 R5 R6 R7 R8 R11 R12 R13 R14 R15 R16 R17 R18 R19 R20 R21 R22 R23 R24 R25 R26 R27 R28 R29 R30 R31 R32 R33 R34 R35 R36 R37 R38 R39 R40 R41 R42 R43 R44 R45 R46 R47 R48 R49 R50 R51 R52 R53 R54 R55 R56 R57 R59 R60 R61 R62 R64 R68 R69 R70 R71 R72: library part RES1, "Resistor"
TP1 TP2 TP3 TP4 TP5 TP6 TP7 TP8 TP9 TP10 TP11 TP12 TP13 TP14 TP15 TP16 TP17 TP18 TP19 TP20 TP21 TP22 TP23 TP24 TP25 TP26 TP27 TP28 TP29 TP30: library part TEST, "TEST POINT"
U1: library part MCP120T, "Voltage Supervisor"
U2: "3.3V CAN Transciever"
U3: library part IL712, "IL712 Optical Isolator"
U4: library part MAX9100EUK, "Micropower comparator"
U5: "MIC5200 - SO8"
U6: "Gumstix Overo Motherboard"
U7: "4 bit bidirectional auto direction sense level translator"
U10: "NXP Cortex-M3 Microcontroller, 100pin 100MHz"
U11: library part CC10-F-E, "Isolated DC-DC Converter"
U12: "150mA Low-Voltage Linear Regulator"
U13: "SEPIC / Boost Controller"
U14: "Adjustable voltage reference"
U19: "Supercapacitor Charger"
U20 U23 U24: "Ultra low capacitance bidirectional ESD protection diodes"
U21: "400mA Low-Dropout Regulator"
U22: "Single Bus Buffer Gate with 3 State Output"
U25: "Dual USB to UART/FIFO"
U26: library part TXB0104PWR, "4 bit bidirectional auto direction sense level translator"
U27: "Serial EEPROM"
Y1 Y2 Y4: library part CRYSTAL, "Crystal"

## Via types
v1: diameter 1.27, hole 0.711, Top Layer to Bottom Layer, 2 vias

## Nets (pads, with @x,y where several pads share a name; then routed paths per layer and width w, separated by ;. In a path a pad name is that pad's centre, name@x,y a point inside that pad or via, vN(x,y) a via of type N, cw(c..) or ccw(c..) an arc to the next point about the centre after c; other vN are vias at no path point)
1V8: C33.1 C77.1 C86.2 R8.2 R68.2 R70.1 U7.2 U7.9 U7.10 U12.5 U26.1
1V8_USB: C64.1 C65.1 C66.1 C75.1 U25.12 U25.37 U25.49 U25.64
3V3: C1.1 C3.1 C12.2 C13.1 C14.1 C18.1 C19.2 C21.1 C22.2 C23.1 C24.2 C25.1 C26.1 C32.1 C87.1 C88.2 J4.1 J4.2 R2.2 R11.2 R12.2 R13.2 R14.2 R15.2 R21.2 R27.1 R38.1 R40.1 R42.1 R60.1 R64.1 TP5.0 TP8.0 U1.2 U3.8 U6.J1_66 U6.J1_67 U6.J4_1 U6.J4_2 U7.19 U10.10 U10.12 U10.28 U10.42 U10.54 U10.71 U10.84 U10.96 U12.1 U12.3 U22.5
3V3_USB: C67.1 C68.1 C69.1 C70.1 C71.1 C76.2 C78.1 L2.1 L3.1 R48.2 R49.2 R50.2 R53.2 R54.2 R55.2 TP18.0 U21.5 U25.20 U25.31 U25.42 U25.50 U25.56 U26.14 U27.6 U27.8
5V: D4.K D5.K R26.2 TP6.0 TP9.0
5V_ISOLATED: C30.1 C56.1 C57.1 D4.A R33.2 U11.7 U19.6 U19.11 U19.12
5V_ISOLATED_VSENSE: U6.J1_40
\RESET_FTDI: R47.1 R51.2 TP23.0 U22.1 U25.14 U26.8
AD0: U6.J4_56
AD1: U6.J4_53
AD2: U6.J4_15
AD3: U6.J4_17
AD4: U6.J4_19
AD5: U6.J4_21
AD6: U6.J4_51
AD7: U6.J4_49
CAN_3V3: C2.1 C5.2 C8.1 U2.3 U3.1 U5.1 U5.2
CAN_5V: J1.1 J2.1
CAN_12V: C7.1 C29.1 C31.1 D3.K F1.2 TP7.0 U5.5 U5.7 U5.8 U11.1
CAN_H_1: J1.4 J2.4 U2.7
CAN_L_1: J1.5 J2.5 U2.6
CANGND: C2.2 C5.1 C7.2 C8.2 C29.2 C31.2 D3.A J1.3 J2.3 R7.2 R20.2 TP10.0 U2.2 U3.4 U5.4 U11.2 U11.3
DBGACK: J4.19 R19.2
DBGRQ: J4.17 R18.2
FB: R32.2 R36.2 U19.5
GND: C1.2 C3.2 C4.2 C6.2 C9.2 C12.1 C13.2 C14.2 C15.2 C16.2 C17.2 C18.2 C19.1 C20.2 C21.2 C22.1 C23.2 C24.1 C25.2 C26.2 C30.2 C32.2 C33.2 C34.2 C35.2 C36.2 C37.2 C38.2 C39.2 C40.1 C42.2 C43.2 C44.2 C45.2 C46.2 C47.2 C56.2 C57.2 C58.2 C59.1 C60.2 C61.2 C62.2 C63.2 C64.2 C65.2 C66.2 C67.2 C68.2 C69.2 C70.2 C71.2 C72.2 C73.2 C74.2 C75.2 C76.1 C77.2 C78.2 C79.2 C80.2 C86.1 C87.2 C88.1 D7.1 D8.K D11.1 J4.4 J4.6 J4.8 J4.10 J4.12 J4.14 J4.16 J4.18 J4.20 J5.2 J8.5 K1.4 LPCRESET.3 LPCRESET.4 OMAPRESET.3 OMAPRESET.4 Q1.2 Q2.1 Q3.2 Q4.2 Q5.1 Q5.2 Q5.3 Q6.2 Q7.2 R3.1 R5.1 R16.1 R17.1 R18.1 R19.1 R25.1 R28.2 R34.2 R35.2 R36.1 R41.1 R44.1 R45.2 R46.1 R51.1 R56.1 R57.1 R62.1 R68.1 R69.1 R72.1 TP14.0 TP25.0 TP26.0 U1.3 U3.5 U4.2 U6.J1_50 U6.J1_56 U6.J1_70 U6.J4_3 U6.J4_33 U7.11 U7.12 U10.11 U10.15 U10.31 U10.41 U10.55 U10.72 U10.83 U10.97 U11.5 U12.2 U13.2 U13.6 U14.2 U19.4 U19.13 U21.2 U22.3 U25.1 U25.5 U25.10 U25.11 U25.13 U25.15 U25.25 U25.35 U25.47 U25.51 U26.4 U26.5 U26.6 U26.7 U26.9 U26.10 U26.11 U27.5
  other v1: 66.26,54.836 67.76,54.836
L\P\C\R\E\S\E\T\: R6.2 U6.J1_5
LEDRED: R61.1 U6.J1_16
LEDYLW: R71.1 U6.J1_21
LPC_CLK: U7.16 U10.62
LPC_CS: U7.15 U10.63
LPC_MISO: U7.17 U10.61
LPC_MOSI: U7.18 U10.60
LPC_RX: U7.14 U10.74
LPC_TX: U7.13 U10.75
NetC4_1: C4.1 C37.1 C38.1 C39.1 D1.K D6.A R27.2 R30.2 TP24.0
NetC6_1: C6.1 C40.2 D2.K D6.K U13.1 U13.8 U13.10
NetC34_1: C34.1 U12.4
NetC35_1: C35.1 R22.1 TP12.0 U6.J1_58
NetC36_1: C36.1 R24.1 R25.2 U6.J1_48
NetC41_1: C41.1 K1.2 Q5.5 Q5.6 Q5.7 Q5.8 R29.2
NetC41_2: C41.2 D1.A K1.3
NetC44_1: C44.1 R31.2 U13.3
NetC45_1: C45.1 R31.1
NetC46_1: C46.1 D9.K U4.5 U14.3 U14.4
NetC59_2: C59.2 J8.1 L1.1 U20.1
NetC62_1: C62.1 C63.1 L2.2 U25.9
NetC72_1: C72.1 U21.4
NetC73_1: C73.1 C74.1 L3.2 U25.4
NetC79_1: C79.1 U25.2 Y4.2
NetC80_1: C80.1 U25.3 Y4.1
NetD7_2: D7.2 Q4.3
NetD7_3: D7.3 Q3.3
NetD7_4: D7.4 R38.2
NetD7_5: D7.5 R40.2
NetD7_6: D7.6 R42.2
NetD8_A: D8.A R53.1
NetD10_A: D10.A R55.1
NetD11_2: D11.2 Q7.3
NetD11_3: D11.3 Q6.3
NetD11_4: D11.4 R60.2
NetD11_5: D11.5 R64.2
NetD11_6: D11.6 R70.2
NetD13_A: D13.A R54.1
NetF1_1: F1.1 J1.2 J2.2
NetJ1_0: J1.0 J2.0 R7.1
NetJ8_2: J8.2@137.068,5.164 U24.0 U25.7
NetJ8_3: J8.3 U23.0 U25.8
NetQ1_1: Q1.1 R6.1 R28.1
NetQ2_2: Q2.2 R1.1
NetQ2_3: Q2.3 R3.2 U4.1
NetQ3_1: Q3.1 R39.2 R41.2
NetQ4_1: Q4.1 R43.2 R44.2
NetQ5_4: Q5.4 U13.7
NetQ6_1: Q6.1 R61.2 R69.2
NetQ7_1: Q7.1 R71.2 R72.2
NetR4_2: R4.2 TP2.0 U10.14
NetR20_1: R20.1 U11.8
NetR23_1: R23.1 R24.2
NetR29_1: R29.1 U13.9
NetR30_1: R30.1 R57.2 U13.4
NetR33_1: R33.1 R37.2 U19.9
NetR37_1: R37.1 U19.7
NetR39_1: R39.1 U10.32
NetR43_1: R43.1 U10.34
NetR46_2: R46.2 U25.6
NetR48_1: R48.1 R52.1 U27.4
NetR49_1: R49.1 U25.63 U27.1
NetR50_1: R50.1 U25.62 U27.2
NetR52_2: R52.2 U25.61 U27.3
NetR56_2: R56.2 U13.5
NetR59_1: R59.1 R62.2 U14.1
NetR59_2: R59.2 U4.3 U14.5
NetTP3_0: TP3.0 U3.7 U10.66
NetTP4_0: TP4.0 U3.6 U10.65
NetTP16_0: TP16.0 U6.J1_59
NetTP17_0: TP17.0 U6.J1_9
NetTP19_0: TP19.0 U10.99 U22.4
NetTP20_0: TP20.0 U6.J1_26 U26.3
NetTP22_0: TP22.0 U6.J1_31 U26.2
NetTP28_0: TP28.0 U10.43
NetTP29_0: TP29.0 U10.51
NetTP30_0: TP30.0 U6.J4_41
NetU2_1: U2.1 U3.3
NetU2_4: U2.4 U3.2
NetU6_J4_6: U6.J4_6
NetU6_J4_7: U6.J4_7
NetU6_J4_8: U6.J4_8
NetU6_J4_24: U6.J4_24 U7.7
NetU6_J4_27: U6.J4_27 U7.6
NetU6_J4_43: U6.J4_43 U7.5
NetU6_J4_44: U6.J4_44 U7.3
NetU6_J4_45: U6.J4_45 U7.4
NetU6_J4_48: U6.J4_48 U7.8
NetU6_J4_66: U6.J4_66
NetU10_6: U10.6
NetU10_7: U10.7
NetU10_8: U10.8
NetU10_9: U10.9
NetU10_20: U10.20
NetU10_21: U10.21
NetU10_24: U10.24
NetU10_25: U10.25
NetU10_26: U10.26
NetU10_27: U10.27
NetU10_29: U10.29
NetU10_30: U10.30
NetU10_33: U10.33
NetU10_35: U10.35
NetU10_36: U10.36
NetU10_37: U10.37
NetU10_38: U10.38
NetU10_39: U10.39
NetU10_40: U10.40
NetU10_44: U10.44
NetU10_45: U10.45
NetU10_46: U10.46
NetU10_47: U10.47
NetU10_48: U10.48
NetU10_49: U10.49
NetU10_50: U10.50
NetU10_52: U10.52
NetU10_53: U10.53
NetU10_56: U10.56
NetU10_58: U10.58
NetU10_59: U10.59
NetU10_64: U10.64
NetU10_67: U10.67
NetU10_68: U10.68
NetU10_69: U10.69
NetU10_70: U10.70
NetU10_73: U10.73
NetU10_76: U10.76
NetU10_77: U10.77
NetU10_78: U10.78
NetU10_79: U10.79
NetU10_80: U10.80
NetU10_81: U10.81
NetU10_82: U10.82
NetU10_85: U10.85
NetU10_86: U10.86
NetU10_87: U10.87
NetU10_88: U10.88
NetU10_89: U10.89
NetU10_90: U10.90
NetU10_91: U10.91
NetU10_92: U10.92
NetU10_93: U10.93
NetU10_94: U10.94
NetU10_95: U10.95
P\F\O\: R21.1 TP11.0 U10.57 U19.8
POWERON: U6.J1_65
PROG: R22.2 R34.1 R35.1 U19.3
R\E\S\E\T\: U6.J4_36
R\S\T\O\U\T: R4.1 R5.2 U6.J1_3
RESET_OMAP: C9.1 OMAPRESET.1 OMAPRESET.2 R8.1 U6.J1_1
RTCK: J4.11 R17.2 U10.100
RTCX1: C15.1 U10.16 Y1.2
RTCX2: C16.1 U10.18 Y1.1
SEPICINPUT: C42.1 C43.1 D2.A D9.A K1.1 R1.2 R26.1 TP15.0 U4.4
SHD: J8.6 R45.1 TP21.0 U20.0 U23.1 U24.1
SRST: C47.1 J4.15 LPCRESET.1 LPCRESET.2 Q1.3 R2.1 R11.1 TP1.0 U1.1 U10.17
TCK: J4.9 R16.2 U10.5
TDI: J4.5 R14.1 U10.2
TDO: J4.13 R12.1 U10.1
TMS: J4.7 R13.1 U10.3
TRST: J4.3 R15.1 U10.4
UART1_RXD: TP27.0 U10.98 U25.39
UART1_TXD: U22.2 U25.38
UART2_RXD: U25.17 U26.12
UART2_TXD: U25.16 U26.13
USB_OTG_DM: U6.J1_37
USB_OTG_DP: U6.J1_36
USB_OTG_ID: U6.J1_46
USB_OTG_VBUS: U6.J1_54
USBLED1: D13.K U25.28 U25.29
USBLED2: D10.K U25.54 U25.55
VBATT: J5.1 U6.J1_52 U10.19
VBUS: C60.1 C61.1 L1.2 R47.2 U21.1 U21.3
VMID: C55.2 C58.1 U19.10
VSUPERCAP: C55.1 D5.A R23.2 R32.1 TP13.0 U19.1 U19.2
WIFI_POWER: U6.J4_39
XTAL1: C17.1 U10.22 Y2.1
XTAL2: C20.1 U10.23 Y2.2
pads on no net: H1.1 H2.1 H3.1 H4.1 J8.2@144.12,5.964 J8.4 U2.5 U2.8 U5.3 U5.6 U6.0 U6.J1_2 U6.J1_4 U6.J1_6 U6.J1_7 U6.J1_8 U6.J1_10 U6.J1_11 U6.J1_12 U6.J1_13 U6.J1_14 U6.J1_15 U6.J1_17 U6.J1_18 U6.J1_19 U6.J1_20 U6.J1_22 U6.J1_23 U6.J1_24 U6.J1_25 U6.J1_27 U6.J1_28 U6.J1_29 U6.J1_30 U6.J1_32 U6.J1_33 U6.J1_34 U6.J1_35 U6.J1_38 U6.J1_39 U6.J1_41 U6.J1_42 U6.J1_43 U6.J1_44 U6.J1_45 U6.J1_47 U6.J1_49 U6.J1_51 U6.J1_53 U6.J1_55 U6.J1_57 U6.J1_60 U6.J1_61 U6.J1_62 U6.J1_63 U6.J1_64 U6.J1_68 U6.J1_69 U6.J4_4 U6.J4_5 U6.J4_9 U6.J4_10 U6.J4_11 U6.J4_12 U6.J4_13 U6.J4_14 U6.J4_16 U6.J4_18 U6.J4_20 U6.J4_22 U6.J4_23 U6.J4_25 U6.J4_26 U6.J4_28 U6.J4_29 U6.J4_30 U6.J4_31 U6.J4_32 U6.J4_34 U6.J4_35 U6.J4_37 U6.J4_38 U6.J4_40 U6.J4_42 U6.J4_46 U6.J4_47 U6.J4_50 U6.J4_52 U6.J4_54 U6.J4_55 U6.J4_57 U6.J4_58 U6.J4_59 U6.J4_60 U6.J4_61 U6.J4_62 U6.J4_63 U6.J4_64 U6.J4_65 U6.J4_67 U6.J4_68 U6.J4_69 U6.J4_70 U7.1 U7.20 U10.13 U11.4 U11.6 U25.18 U25.19 U25.21 U25.22 U25.23 U25.24 U25.26 U25.27 U25.30 U25.32 U25.33 U25.34 U25.36 U25.40 U25.41 U25.43 U25.44 U25.45 U25.46 U25.48 U25.52 U25.53 U25.57 U25.58 U25.59 U25.60 U27.7

## Silkscreen, mask and mechanical layers (free items; w line width, h text height)
Top Overlay:
  lines w0.254: 0.4,21.3 9.8,21.3 12.8,24.3 12.8,40.2 15.7,43.1 22.3,43.1 23.6,44.4 23.6,51 24.5,51.9 52.1,51.9 55,54.8 55,80.9
  text "SION" at 106.4,201.6 h6
  text "R2" at 116,196.9 h10 r5
  text "Sunswift IVy Observer Node - Revision 2" at 64.5,186.6 h3
  text "Irving Suryajaya Tjiptowarsono" at 64.3,181.3 h3
Mechanical 1:
  the board outline again, w0.254
Mechanical 16:
  lines w0.127: -61.9,9.46 -56.82,9.46 ; -61.9,57.72 -56.82,57.72 ; -61.9,105.98 -56.82,105.98 ; 11.125,-38.8 11.125,-33.72 ; 11.125,149.16 11.125,154.24 ; 84.15,-38.8 84.15,-33.72 ; 84.15,149.16 84.15,154.24 ; 110.82,-26.1 225.12,-26.1 ; 110.82,-18.48 225.12,-18.48 ; 110.82,-10.86 148.92,-10.86 ; 148.92,-33.72 148.92,-18.48 148.92,-3.24 ; 157.175,-38.8 157.175,-33.72 ; 157.175,149.16 157.175,154.24 ; 202.26,-33.72 202.26,-18.48 ; 225.12,9.46 230.2,9.46 ; 110.82,-33.72 110.82,-3.24 ; 110.82,-33.72 225.12,-33.72 ; 110.82,-33.72 75.26,-33.72 75.26,-3.24 110.82,-3.24 ; 110.82,-3.24 148.92,-3.24 ; 148.92,-3.24 225.12,-3.24 225.12,-33.72 ; 225.12,-33.72 225.12,149.16 -56.82,149.16 -56.82,-33.72 225.12,-33.72 ; -61.9,-38.8 -61.9,154.24 230.2,154.24 230.2,-38.8 -61.9,-38.8
  text "4" at 197.3,151.2 h1.78
  text "1" at -25.654,150.811 h1.78
  text "2" at 46.99,150.811 h1.78
  text "3" at 120.142,150.811 h1.78
  text "A" at -59.995,127.799 h1.78
  text "B" at -59.995,79.742 h1.78
  text "C" at -59.995,31.228 h1.78
  text "C" at 227.025,31.228 h1.78
  text "ENGINEER:" at 112.09,-5.78 h1.14
  text "TITLE:" at 150.19,-5.78 h1.14
  text "Name" at 113.995,-9.082 h1.78
  text "SION - R2" at 159.207,-12.765 h5.08
  text "PCB DESIGNER:" at 112.09,-13.273 h1.14
  text "Sunswift" at 78.054,-13.654 h5.08
  text "Name" at 113.995,-16.575 h1.78
  text "D" at -59.995,-16.778 h1.78
  text "D" at 227.025,-16.778 h1.78
  text "DATE:" at 112.09,-21.02 h1.14
  text "PART NO.:" at 150.19,-21.02 h1.14
  text "REV:" at 203.53,-21.02 h1.14
  text "Room 342" at 79.07,-23.56 h1.78
  text "Number" at 159.969,-23.941 h1.78
  text ".PRINT_DATE" at 113.36,-24.068 h1.78
  text "Rev" at 207.848,-24.195 h1.78
  text "EE Building" at 79.07,-26.1 h1.78
  text "UNSW, Sydney Australia" at 79.07,-28.64 h1.78
  text "FILE NAME:" at 112.09,-28.64 h1.14
  text "DWG NO:" at 150.19,-28.64 h1.14
  text "SCALE:" at 203.53,-28.64 h1.14
  text "2052" at 79.07,-31.18 h1.78
  text "Number" at 160.604,-31.18 h1.78
  text "Scale" at 208.991,-31.307 h1.78
  text ".PCB_FILE_NAME_NO_PATH" at 113.36,-31.688 h1.78
  text "1" at -25.654,-37.149 h1.78
  text "2" at 46.99,-37.149 h1.78
  text "3" at 120.142,-37.149 h1.78
  text "4" at 193.04,-37.149 h1.78

## Text inside footprints (layer, text, board x,y; h text height)
C55: Top Overlay "+" at 77,41.828 h1.52 r90
C58: Top Overlay "+" at 77,52.496 h1.52 r90
ID1: Top Overlay "ID" at 136.85,210.8 h1.52 r90
J1: Top Overlay "131-040" at 9.449,46.558 h0.76 r90
J2: Top Overlay "131-040" at 9.449,29.286 h0.76 r90
J4: Top Overlay "2" at 20.32,10.16 h1.27 r90; Top Overlay "1" at 22.86,10.16 h1.27 r90; Top Overlay "19" at 22.86,37.084 h1.27 r90; Top Overlay "20" at 20.32,37.084 h1.27 r90
J5: Top Overlay "+" at 62.128,21.808 h3 r270; Top Overlay "+" at 62.128,6.608 h3 r270; Top Overlay "-" at 56.928,11.208 h3 r270
U6: Top Overlay "J1" at 131.198,70.868 h1.52 r90; Top Overlay "J4" at 131.298,32.318 h1.52 r90; Top Overlay "Overo Motherboard" at 138.748,34.918 h1.52 r90; Top Overlay "Gumstix" at 136.098,41.868 h1.52 r90
U11: Top Overlay "SHIELD" at 43.528,54.42 h1; Top Overlay "SHIELD" at 27.628,76.42 h1; Top Overlay "TDK-Lambda CC10-F-E" at 28.128,68.12 h1; Top Overlay "Isolated 10W DC-DC Converter" at 25.228,65.62 h1; Top Overlay "+VIN" at 22.528,73.12 h1; Top Overlay "RC" at 22.528,63.12 h1; Top Overlay "-VIN" at 22.628,58.02 h1; Top Overlay "NC" at 53.028,57.92 h1; Top Overlay "-VOUT" at 50.028,62.92 h1; Top Overlay "TRM" at 51.928,68.12 h1; Top Overlay "+VOUT" at 50.028,73.12 h1